# Altium PCB relay.PcbDoc
Units mil, origin at the board's own origin, x right, y up, seen from the top; angles counter-clockwise.
Board outline 1401.57 x 1050 mil, 2 copper layers (Top, Bottom), stack 61.811 mil thick; 76 components, 42 nets, 205 pads, 48 vias.
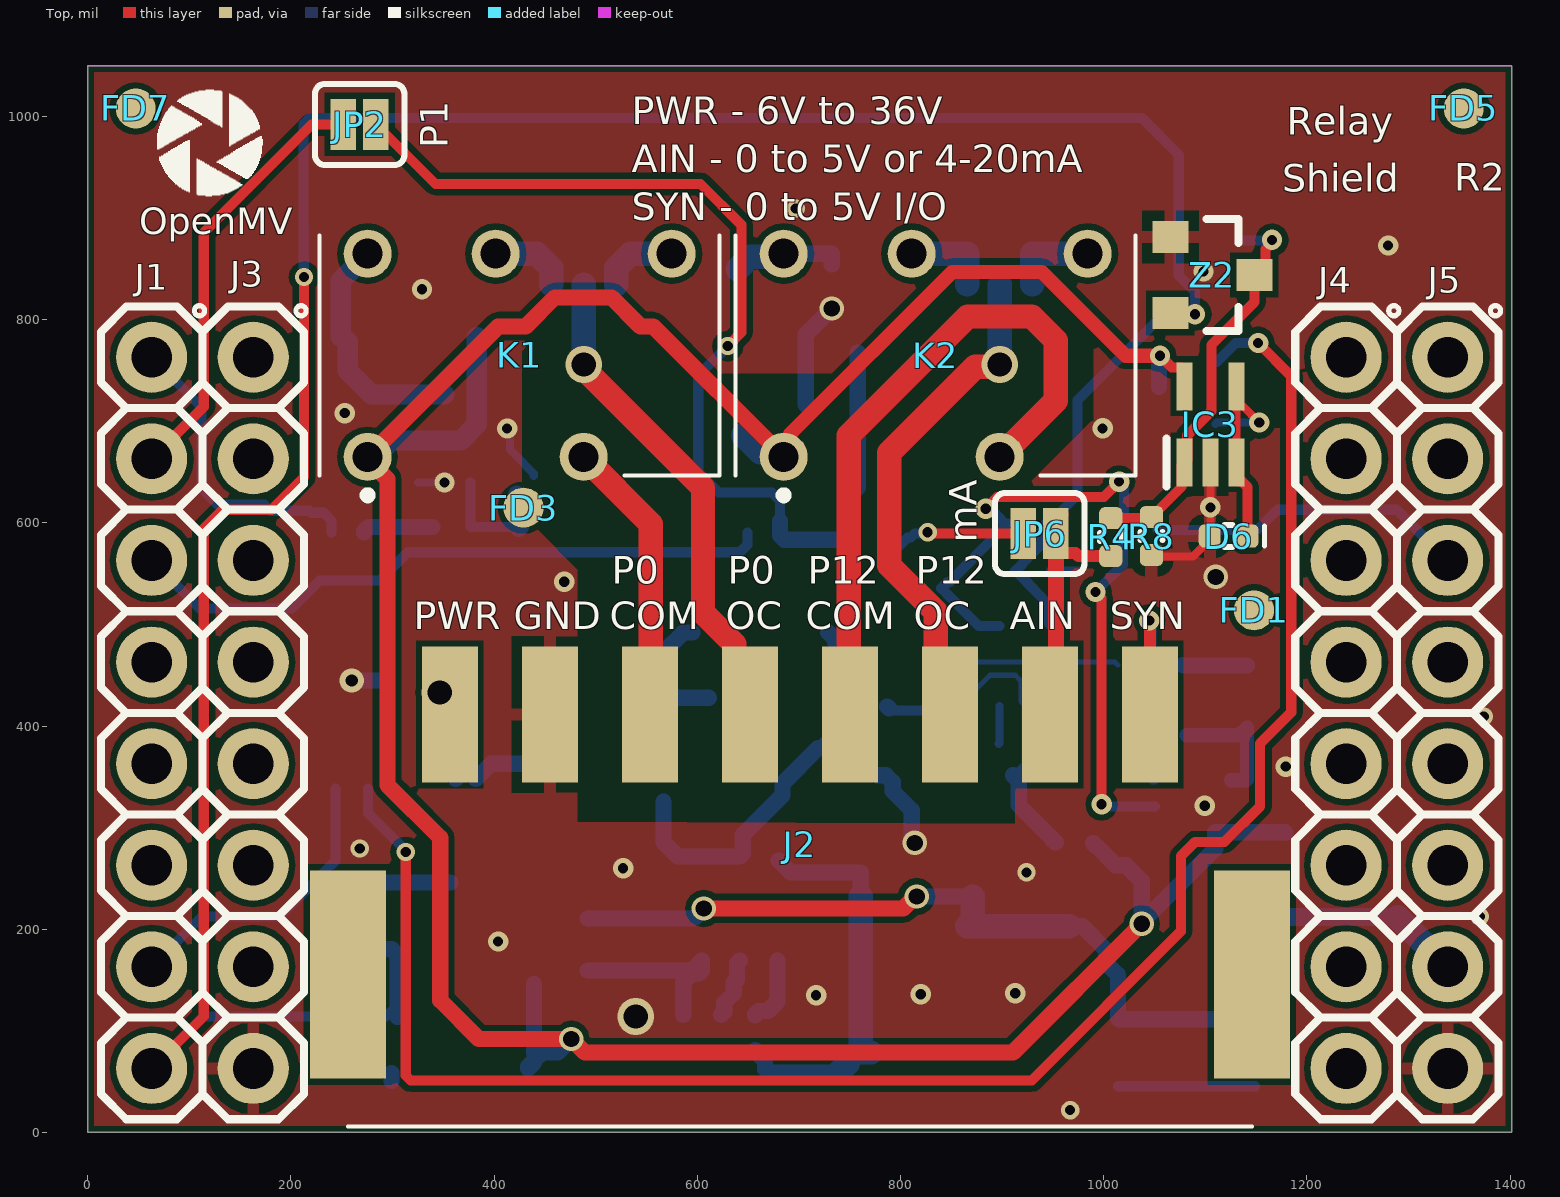
[diagram p0: Top view]
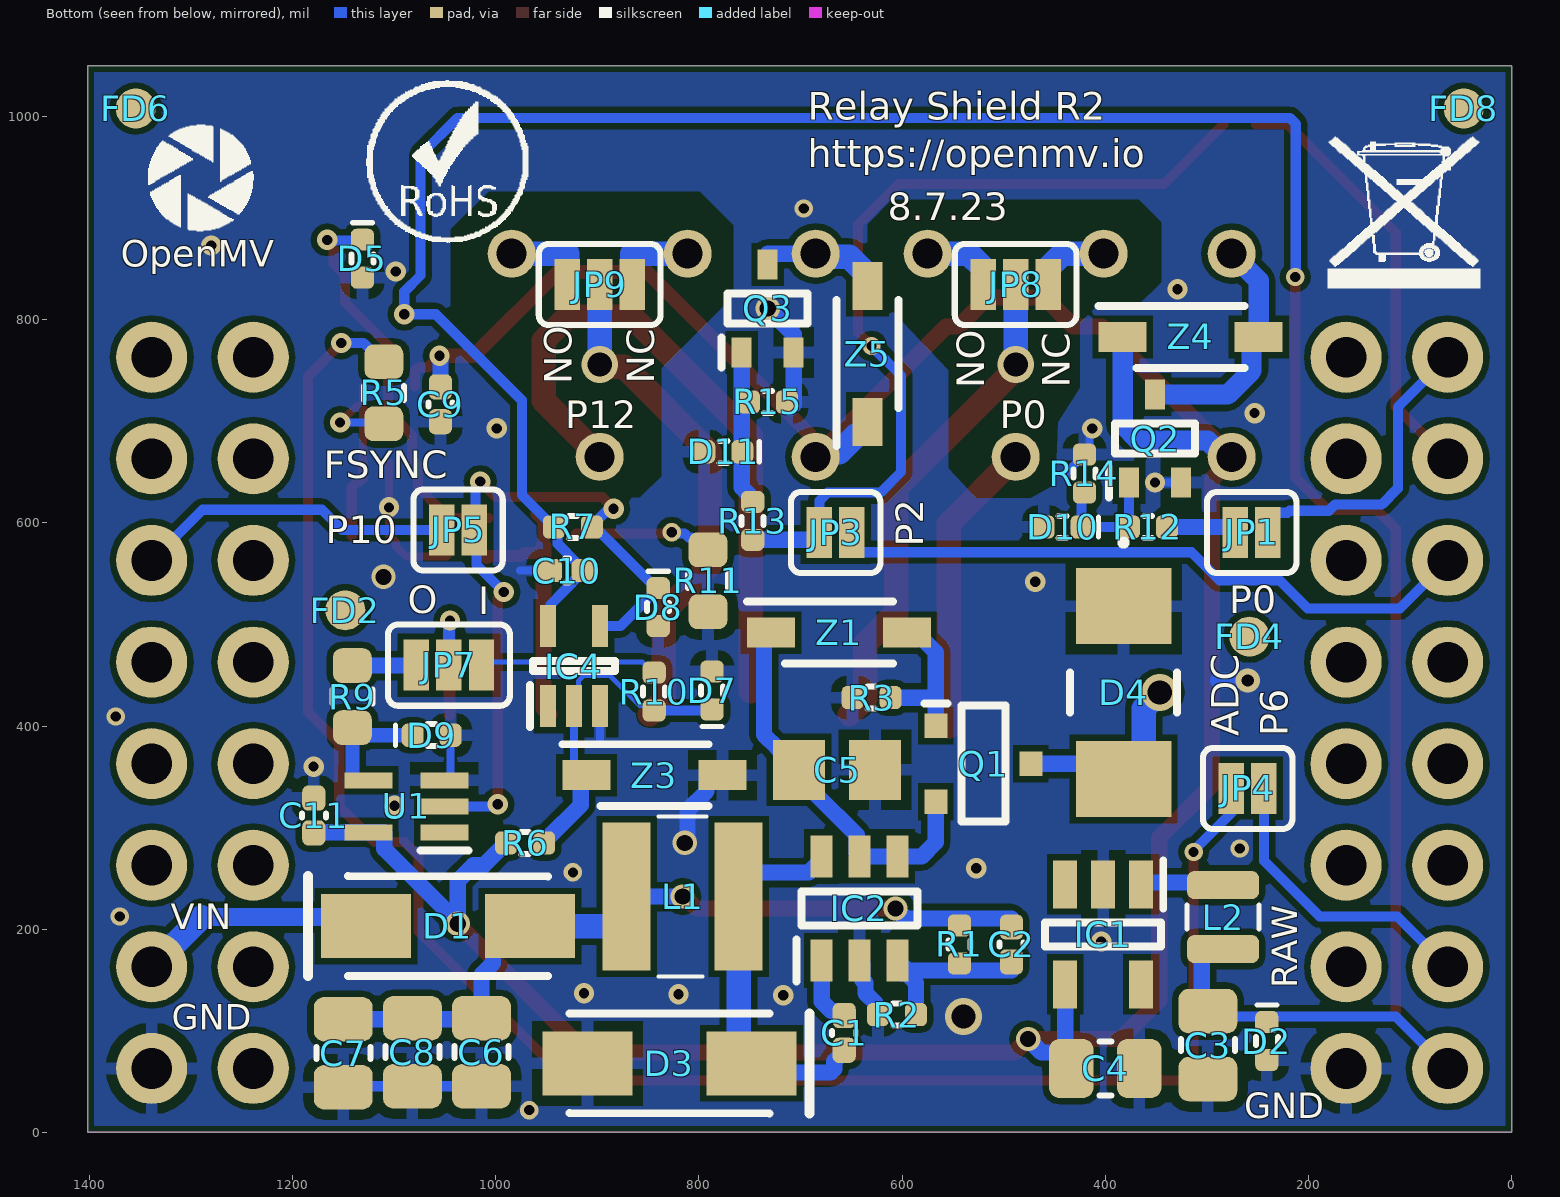
[diagram p1: Bottom view, seen from below]
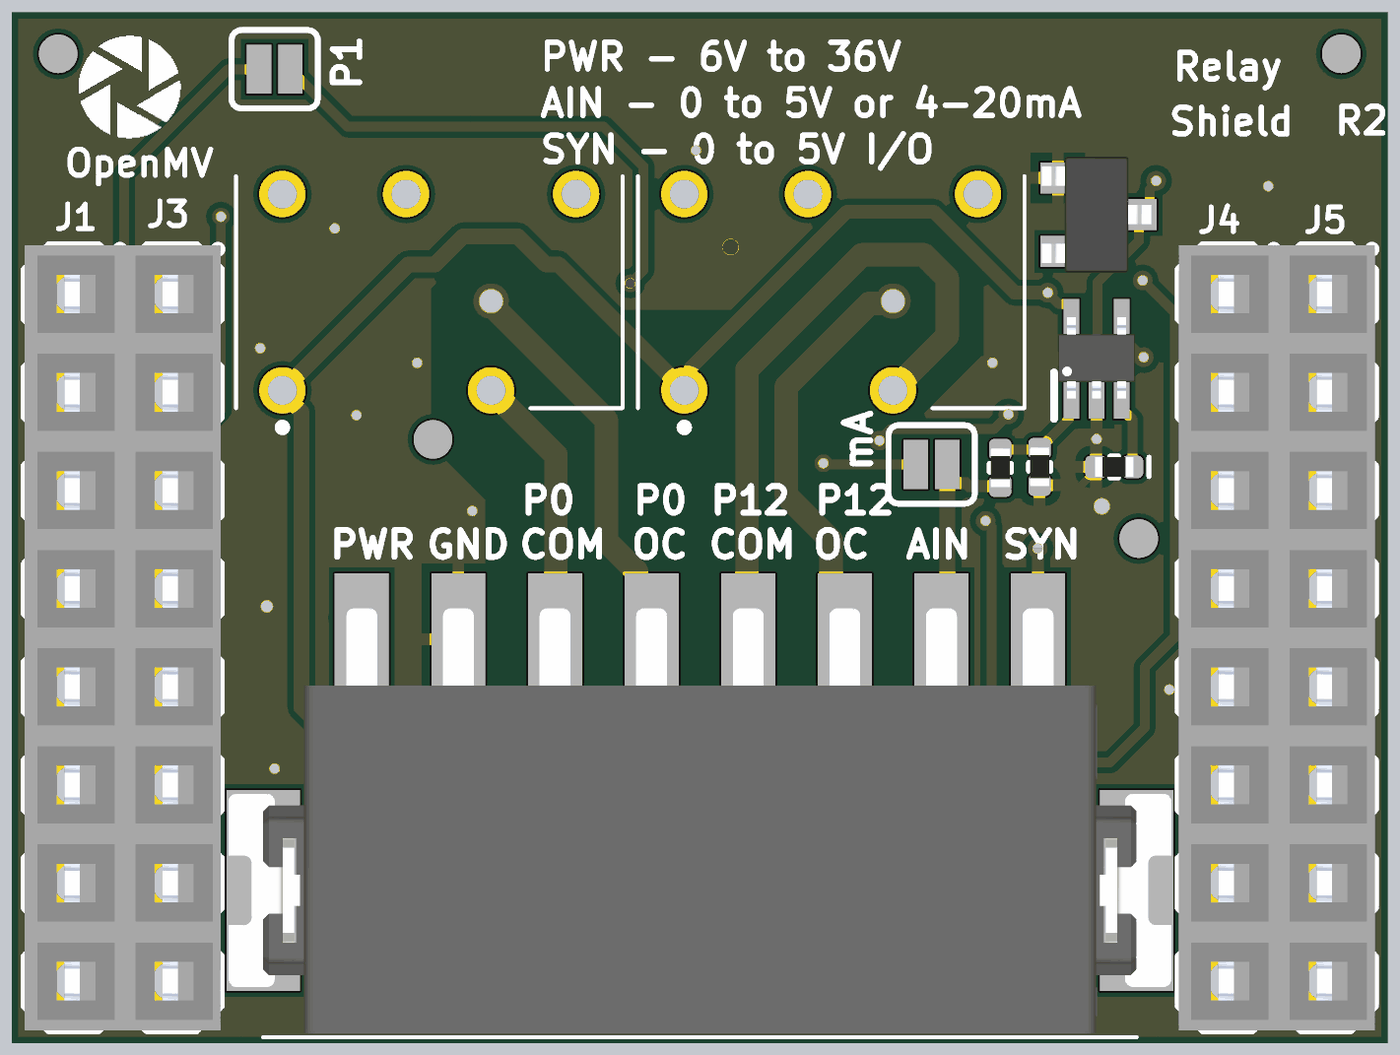
[diagram p2: 3D render of the assembled board from above, using the file's embedded part models]
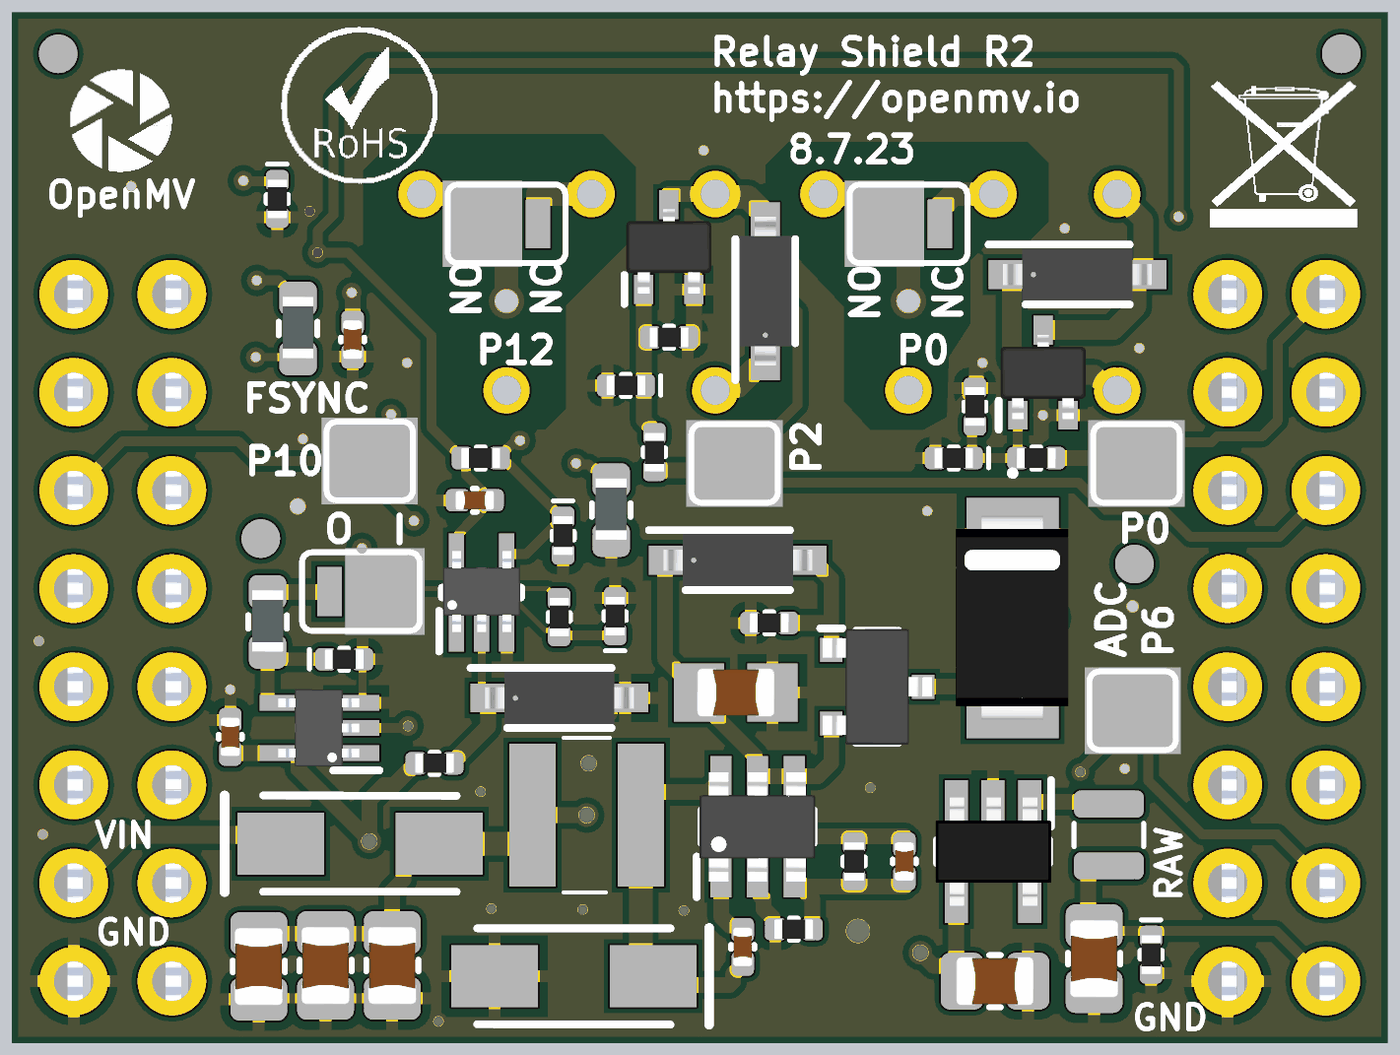
[diagram p3: 3D render of the assembled board from below, using the file's embedded part models]

## Layer stack, top to bottom
Top Solder: solder mask 0.4, Solder Resist, Dk 3.5
Top: signal copper 1.378
Dielectric 1: dielectric 59.0551, FR-4, Dk 4.8
Bottom: signal copper 1.378
Bottom Solder: solder mask 0.4, Solder Resist, Dk 3.5

## Board outline
0,1050 0,0 1401.57,0 1401.57,1050

## Design rules (kind name [scope] priority, off if disabled: settings)
BoardOutlineClearance mdCopperDimension [All] p1: gap=5 ignorepadtopadclearanceinfootprint=FALSE
Clearance AC [InNetClass('acpwr') vs not InNetClass('acpwr')] p1: gap=35 ignorepadtopadclearanceinfootprint=FALSE
Clearance Clearance_for_PolygonClass_Isolate_6 [InPolygonClass('Isolate_6') vs IsArc Or IsTrack Or IsPad Or IsVia Or IsFill Or IsRegion Or IsText] p2: gap=6 ignorepadtopadclearanceinfootprint=FALSE
Clearance [All] p3: gap=5 ignorepadtopadclearanceinfootprint=FALSE
ComponentClearance J1 [InComponent('J1')] p1: gap=0 collisioncheckmode=3 verticalgap=0 showdistances=FALSE
ComponentClearance [not InComponent('J1')] p2: gap=10 collisioncheckmode=3 verticalgap=10 showdistances=FALSE
HoleSize HoleSize_For_NetClass_hipwr [InNetClass('hipwr')] p1: absolutevalues=TRUE maxlimit=10 minlimit=10 maxpercent=80.000 minpercent=20.000
HoleSize HoleSize_For_NetClass_acpwr [InNetClass('acpwr')] p2: absolutevalues=TRUE maxlimit=10 minlimit=10 maxpercent=80.000 minpercent=20.000
HoleSize HoleSize_For_NetClass_signal [InNetClass('signal')] p3: absolutevalues=TRUE maxlimit=10 minlimit=10 maxpercent=80.000 minpercent=20.000
HoleSize HoleSize_For_NetClass_pwr [InNetClass('pwr')] p4: absolutevalues=TRUE maxlimit=10 minlimit=10 maxpercent=80.000 minpercent=20.000
HoleSize HoleSize_For_NetClass_gnd [InNetClass('gnd')] p5: absolutevalues=TRUE maxlimit=10 minlimit=10 maxpercent=80.000 minpercent=20.000
HoleSize [All] p6: absolutevalues=TRUE maxlimit=100000 minlimit=10 maxpercent=80.000 minpercent=20.000
HoleToHoleClearance mdDrill [All] p1: gap=10 allowstackedmicrovias=TRUE
MinimumSolderMaskSliver [All] p1 off: minsoldermaskwidth=10
PasteMaskExpansion Expansion_SMDPaste_OFF [InPadClass('SMDPaste_OFF')] p1: expansion=0
PasteMaskExpansion mlMinCreamFrame [All] p2: expansion=0
PolygonConnect PolygonConnect_For_PolygonThermal_ON_Width120000_Gap100000 [InPolygonClass('PolygonThermal_ON_Width120000_Gap100000') vs Not IsVia] p1: connectstyle=Relief reliefconductorwidth=12 reliefentries=4 polygonreliefangle="90 Angle" airgapwidth=10
PolygonConnect ThermalVias [IsVia] p2: connectstyle=Direct reliefconductorwidth=10 reliefentries=4 polygonreliefangle="90 Angle" airgapwidth=10
PolygonConnect [All] p3: connectstyle=Relief reliefconductorwidth=10 reliefentries=4 polygonreliefangle="90 Angle" airgapwidth=10
RoutingVias [All] p1: holewidth=10 width=18 viastyle="Through Hole" minholewidth=10 minwidth=18 maxholewidth=100 maxwidth=100
SolderMaskExpansion mlMinStopFrame [All] p1: expansion=2 istentingtop=FALSE
Width [All] p1: maxlimit=200 minlimit=5 preferedwidth=5
25 further rules are at their usual default settings.

## Classes and differential pairs
polygon class PolygonThermal_ON_Width120000_Gap100000: Polygon_1_Net_GND Polygon_2_Net_GND
polygon class Isolate_6: Polygon_1_Net_GND Polygon_2_Net_GND
pad class SMDPaste_OFF: FD1-1 FD2-1 FD3-1 FD4-1 FD5-1 FD6-1 FD7-1 FD8-1 JP1-1 JP1-2 JP2-1 JP2-2 JP3-1 JP3-2 JP4-1 JP4-2 JP5-1 JP5-2 JP6-1 JP6-2 JP7-1 JP7-2 JP7-3 JP8-1 JP8-2 JP8-3 JP9-1 JP9-2 JP9-3

## Components (designator, comment, footprint, x,y, rotation, side; value= is the part's Value field where it differs from the comment)
C1 "0.1uF" 0402-CAP 657,98 r270 bottom
C2 "100pF" 0402-CAP 492.31,185.04 r270 bottom
C3 "22uF" 0805 299,86 r90 bottom
C4 "22uF" 0805 400,63 r0 bottom
C5 "10uF" C0805 664,357 r180 bottom
C6 "22uF" 0805 1014,79 r90 bottom
C7 "22uF" 0805 1150,78 r90 bottom
C8 "22uF" 0805 1082,79 r90 bottom
C9 "0.1uF" 0402-CAP 1054.4,716.71 r90 bottom
C10 "0.1uF" 0402-CAP 930,553 r180 bottom
C11 "0.1uF" 0402-CAP 1179,312 r270 bottom
D1 "FM240A" DIOM5025X231N 1047,203 r180 bottom
D2 "CPDQT5V0HE-HF" CPDQT5V0HEHF 241,90 r270 bottom
D3 "FM240A" DIOM5025X231N 829,68 r0 bottom
D4 "SMAJ40CAE3_TR13" SMAJ40CAE3TR13 382,433 r270 bottom
D5 "CPDQT5V0HE-HF" CPDQT5V0HEHF 1131.16,859.99 r270 bottom
D6 "CPDQT5V0HE-HF" CPDQT5V0HEHF 1123,587 r180 top
D7 "CPDQT5V0HE-HF" CPDQT5V0HEHF 787,435 r90 bottom
D8 "CPDQT5V0HE-HF" CPDQT5V0HEHF 840,517 r270 bottom
D9 "CPDQT5V0HE-HF" CPDQT5V0HEHF 1063,391 r180 bottom
D10 "CPDQT5V0HE-HF" CPDQT5V0HEHF 442,596 r0 bottom
D11 "CPDQT5V0HE-HF" CPDQT5V0HEHF 776,670 r0 bottom
FD1 "FIDUCIAL1X2" FIDUCIAL-1X2 1148,514 r0 top
FD2 "FIDUCIAL1X2" FIDUCIAL-1X2 1148,514 r180 bottom
FD3 "FIDUCIAL1X2" FIDUCIAL-1X2 429,615 r0 top
FD4 "FIDUCIAL1X2" FIDUCIAL-1X2 258,488 r180 bottom
FD5 "FIDUCIAL1X2" FIDUCIAL-1X2 1354.33,1007.87 r0 top
FD6 "FIDUCIAL1X2" FIDUCIAL-1X2 1354.33,1007.87 r180 bottom
FD7 "FIDUCIAL1X2" FIDUCIAL-1X2 47.24,1007.87 r0 top
FD8 "FIDUCIAL1X2" FIDUCIAL-1X2 47.24,1007.87 r180 bottom
IC1 "TPS613222ADBVR" SOT95P280X145-5N 402,195 r270 bottom
IC2 "AP64060WU-7" SOT95P280X100-6N 641.91,220.47 r90 bottom
IC3 "LM321LVIDCKR" SOT65P210X110-5N 1105,697 r90 top
IC4 "74LVC1G07GW,125" SOT65P212X110-5N 923,459 r90 bottom
J1 "SSQ-108-03-T-S" HDR_1X8 62.99,762.99 r0 top
J2 "1771088" 1771088 700.97,411.45 r0 top
J3 "SSQ-108-03-T-S" HDR_1X8 162.99,762.99 r0 top
J4 "SSQ-108-03-T-S" HDR_1X8 1238.58,762.99 r0 top
J5 "SSQ-108-03-T-S" HDR_1X8 1338.58,762.99 r0 top
JP1 "JUMPER-SMT_2_NC_PASTE_SILK" SMT-JUMPER_2_NC_PASTE_SILK 255.91,590.55 r0 bottom
JP2 "JUMPER-SMT_2_NO_SILK" SMT-JUMPER_2_NO_SILK 267.72,992.13 r0 top
JP3 "JUMPER-SMT_2_NC_PASTE_SILK" SMT-JUMPER_2_NC_PASTE_SILK 665.35,590.55 r0 bottom
JP4 "JUMPER-SMT_2_NC_PASTE_SILK" SMT-JUMPER_2_NC_PASTE_SILK 259.84,338.58 r0 bottom
JP5 "JUMPER-SMT_2_NC_PASTE_SILK" SMT-JUMPER_2_NC_PASTE_SILK 1037,593 r180 bottom
JP6 "JUMPER-SMT_2_NO_SILK" SMT-JUMPER_2_NO_SILK 937,589.49 r0 top
JP7 "JUMPER-SMT_3_1-NC_PASTE_SILK" SMT-JUMPER_3_1-NC_PASTE_SILK 1046,460 r180 bottom
JP8 "JUMPER-SMT_3_1-NC_PASTE_SILK" SMT-JUMPER_3_1-NC_PASTE_SILK 488.19,834.65 r0 bottom
JP9 "JUMPER-SMT_3_1-NC_PASTE_SILK" SMT-JUMPER_3_1-NC_PASTE_SILK 897.64,834.65 r0 bottom
K1 "IMC03TS" IMC03TS 425.2,755.91 r0 top
K2 "IMC03TS" IMC03TS 834.65,755.91 r0 top
L1 "NRS4018T100MDGJ" NRS4018T100MDGJ 815.98,232.26 r0 bottom
L2 "MAKK2016T2R2M" INDC2016X100N 284,212 r90 bottom
Q1 "SSM3J356R,LF" SOTFL95P240X88-3N 520,363 r180 bottom
Q2 "2N7002KW_R1_00001" SOT65P210X110-3N 351,683 r90 bottom
Q3 "2N7002KW_R1_00001" SOT65P210X110-3N 732.28,811.02 r90 bottom
R1 "133K" 0402-RES 543.49,185.04 r270 bottom
R2 "22.1K" 0402-RES 605,116 r0 bottom
R3 "100K" 0402-RES 630,428 r0 bottom
R4 "51K" 0402-RES 1007,586 r270 top
R5 "470" R0603 1110,729 r90 bottom
R6 "100K" 0402-RES 971,285 r180 bottom
R7 "100K" 0402-RES 924,596 r180 bottom
R8 "100K" 0402-RES 1047,587 r270 top
R9 "470" R0603 1141,430 r90 bottom
R10 "10K" 0402-RES 844,434 r90 bottom
R11 "240" R0603 791,544 r90 bottom
R12 "10K" 0402-RES 358,596 r0 bottom
R13 "10K" 0402-RES 747,602 r90 bottom
R14 "100K" 0402-RES 420.49,648.51 r270 bottom
R15 "100K" 0402-RES 732,719 r0 bottom
U1 "74LVC1G17SE-7" SOT65P210X110-5N 1088,321 r0 bottom
Z1 "MMSZ5231B-7-F" SOD3716X145N 662,492 r180 bottom
Z2 "BAT54S_R1_00001" SOT23-3 1105,844 r270 top
Z3 "MMSZ5231B-7-F" SOD3716X145N 843.73,351.61 r180 bottom
Z4 "MMSZ5231B-7-F" SOD3716X145N 316,783 r180 bottom
Z5 "MMSZ5231B-7-F" SOD3716X145N 634,766 r90 bottom

## Footprints (in the part's own frame and the unit in brackets; to place one, negate y for a bottom-side part, rotate by r counter-clockwise, add the part's x,y. Pads: shape width x height; smd on the part's side, far side on the other; paste and mask are expansions set on the pad)
0402-CAP [mm] "Chip Capacitor, 2-Leads, Body  0402 (in) 1005 (mm), IPC Medium Density"
  rrect52% 0.63x0.58 smd mask+0.05: 1(-0.435,0) 2(0.435,0)
  silkscreen extent -0.05,-0.3 0.05,0.3, body extent -0.5,-0.25 0.5,0.25, height 0.5
0402-RES [mm] "Chip Resistor, 2-Leads, Body  0402 (in) 1005 (mm), IPC Medium Density"
  rrect51% 0.55x0.58 smd mask+0.05: 1(-0.475,0) 2(0.475,0)
  silkscreen extent -0.1,-0.28 0.1,0.28, body extent -0.5,-0.25 0.5,0.25, height 0.34
0805 [mm] "Chip Capacitor, Body 0805 imperial, 2.0x1.2mm, IPC Medium Density"
  rrect45% 1.11x1.47 smd: 1(-0.85,0) 2(0.85,0)
  silkscreen extent -0.15,-0.67 0.15,0.67, body extent -1,-0.62 1,0.63, height 1.25
1771088 [mm] "1771088"
  rect 1.4x3.4 smd: 1(-8.75,0) 2(-6.25,0) 3(-3.75,0) 4(-1.25,0) 5(1.25,0) 6(3.75,0) 7(6.25,0) 8(8.75,0)
  rect 1.9x5.2 smd: 9(-11.3,-6.5) 10(11.3,-6.5)
  silkscreen extent -11.3,-10.3 11.3,-10.3, body extent -12.2,-10.2 12.2,0.8, height 5.1
C0805 [mil] "C0805"
  rect 51.18x59.06 smd: 1(-37.4,0) 2(37.4,0)
  body extent -39,-25 39,25, height 49
CPDQT5V0HEHF [mm] "CPDQT5V0HEHF"
  rrect51% 0.55x0.58 smd mask+0.05: 1(-0.475,0) 2(0.475,0)
  silkscreen extent -0.9,-0.27 0.1,0.28, body extent -0.5,-0.25 0.5,0.25, height 0.34
DIOM5025X231N [mil] "DIOM5025X231N"
  rect 88.58x62.99 smd: 1(-80.71,0) 2(80.71,0)
  silkscreen extent -138,-49 98,49, body extent -89,-49 89,49, height 79
FIDUCIAL-1X2 [mm] "FIDUCIAL-1X2"
  rrect100% 1x1 smd paste+0: 1(0,0)
HDR_1X8 [mil]
  round 70 hole 40: 1(0,0) 2(0,-100) 3(0,-200) 4(0,-300) 5(0,-400) 6(0,-500) 7(0,-600) 8(0,-700)
  silkscreen extent -50,-750 52,51, body extent -50,-750 50,50, height 335
IMC03TS [mil] "IMC03TS"
  round 47.24 / inner round 0 / far side round 47.24 hole 29.53: 1(-149.61,-90.94) 3(62.99,-90.94) 5(149.61,109.06) 7(-23.62,109.06) 8(-149.61,109.06)
  silkscreen extent -197,-133 197,127, body extent -197,-106 197,130, height 222
INDC2016X100N [mm] "INDC2016X100N"
  rrect50% 0.7x1.8 smd: 1(-0.8,0) 2(0.8,0)
  silkscreen extent -0.3,-0.9 0.3,0.9, body extent -1,-0.8 1,0.8, height 1
NRS4018T100MDGJ [mm] "NRS4018T100MDGJ"
  rect 1.2x3.7 smd: 1(-1.4,0) 2(1.4,0)
  silkscreen extent -0.6,-2 0.6,2, body extent -2,-2 2,2, height 1.8
R0603 [mm] "R0603"
  rrect51% 0.87x0.97 smd mask+0.05: 1(-0.8,0) 2(0.75,0)
  silkscreen extent -0.2,-0.5 0.15,0.5, body extent -0.8,-0.4 0.8,0.4, height 0.45
SMAJ40CAE3TR13 [mm] "SMAJ40CAE3TR13"
  rect 1.9x2.39 smd: 1(-2.16,0) 2(2.16,0)
  silkscreen extent -3.8,-1.34 0.5,1.34, body extent -2.65,-1.47 2.63,1.45, height 2.41
SMT-JUMPER_2_NC_PASTE_SILK [mil] "SMT-JUMPER_2_NC_PASTE_SILK"
  rect 25x50 smd paste+0: 1(-16,0) 2(16,0)
  silkscreen extent -44,-40 44,40
SMT-JUMPER_2_NO_SILK [mil] "SMT-JUMPER_2_NO_SILK"
  rect 25x50 smd paste+0: 1(-16,0) 2(16,0)
  silkscreen extent -44,-40 44,40
SMT-JUMPER_3_1-NC_PASTE_SILK [mil] "SMT-JUMPER_3_1-NC_PASTE_SILK"
  rect 25x50 smd paste+0: 1(-32,0) 2(0,0) 3(32,0)
  silkscreen extent -60,-40 60,40
SOD3716X145N [mil] "SOD3716X145N"
  rect 47.24x29.53 smd: 1(-66.93,0) 2(66.93,0)
  silkscreen extent -91,-31 53,31, body extent -76,-27 76,27, height 32
SOT23-3 [mil] "SOT23-3"
  rect 31.5x35.43 smd: 1(-37.4,-39.37) 2(37.4,-39.37) 3(0,43.31)
  silkscreen extent -55,-4 55,28, body extent -59,-56 59,56, height 47
SOT65P210X110-3N [mm] "SOT65P210X110-3N"
  rect 0.75x0.5 smd: 1(-1.1,0.65) 2(-1.1,-0.65) 3(1.1,0)
  silkscreen extent -1.47,-1 0.37,1.15, body extent -1.2,-1.1 1.2,1.1, height 1.1
SOT65P210X110-5N [mm] "SOT65P210X110-5N"
  rect 1.2x0.4 smd: 1(-0.95,0.65) 2(-0.95,0) 3(-0.95,-0.65) 4(0.95,-0.65) 5(0.95,0.65)
  silkscreen extent -1.55,1.1 -0.35,1.1, body extent -1.02,-1 1.07,1, height 0.96
SOT65P212X110-5N [mm] "SOT65P212X110-5N"
  rect 1.05x0.4 smd: 1(-1,0.65) 2(-1,0) 3(-1,-0.65) 4(1,-0.65) 5(1,0.65)
  silkscreen extent -1.53,-1.02 0.12,1.1, body extent -1.02,-1 1.07,1, height 0.96
SOT95P280X100-6N [mil] "SOT95P280X100-6N"
  rect 41.34x21.65 smd: 1(-51.18,37.4) 2(-51.18,0) 3(-51.18,-37.4) 4(51.18,-37.4) 5(51.18,0) 6(51.18,37.4)
  silkscreen extent -72,-57 17,62, body extent -56,-59 56,59, height 44
SOT95P280X145-5N [mil] "SOT95P280X145-5N"
  rect 47.24x23.62 smd: 1(-49.21,37.4) 2(-49.21,0) 3(-49.21,-37.4) 4(49.21,-37.4) 5(49.21,37.4)
  silkscreen extent -73,-57 12,59, body extent -55,-59 55,59, height 46
SOTFL95P240X88-3N [mm] "SOTFL95P240X88-3N"
  rect 0.575x0.62 smd: 1(-1.188,0.95) 2(-1.188,-0.95) 3(1.188,0)
  silkscreen extent -1.47,-1.45 0.55,1.51, body extent -1.42,-1.5 1.42,1.5, height 1.11

## Part data
C1 C9 C10 C11: library part CAP0402-CAP, "CapacitorStandard 0603 ceramic capacitor, and 0.1\" leaded capacitor.", MPN=GRM155R71H104KE14D, DeviceName=0402-CAP, DeviceSetName=CAP, GateName_1=G$1, LibraryName=sfe, SymbolName_1=CAP
C2: library part CAP0402-CAP, "CapacitorStandard 0603 ceramic capacitor, and 0.1\" leaded capacitor.", MPN=CC0402JRNPO9BN101, DeviceName=0402-CAP, DeviceSetName=CAP, GateName_1=G$1, LibraryName=sfe, SymbolName_1=CAP
C3 C4 C6 C7 C8: library part 22UF-0805-6.3V-20%, "22ÂµF ceramic capacitors    A capacitor is a passive two-terminal electrical component used to store electrical energy temporarily in an electric field.", MPN=CL21A226MQQNNNE, DeviceName=-0805-6.3V-20%, DeviceSetName=22UF, GateName_1=G$1, LibraryName=SparkFun-Capacitors, PROD_ID=CAP-08402, SymbolName_1=CAP
C5: library part C-EUC0805, "CAPACITOR, European symbol", MPN=GRM21BR61H106KE43K, DeviceName=C0805, DeviceSetName=C-EU, GateName_1=G$1, LibraryName=rcl, POPULARITY=88, SPICEPREFIX=C, SymbolName_1=C-EU
D1 D3: "Diodes - General Purpose, Power, Switching GP Si Rectifier SMB,2A,40V   Source:  Datasheet", MANUFACTURER_NAME=Rectron, DeviceSetName=FM240A, GateName_1=G$1, HEIGHT=2.31mm, LibraryName=FM240A, MANUFACTURER_PART_NUMBER=FM240A, MOUSER_PART_NUMBER=583-FM240A, MOUSER_PRICE-STOCK=https://www.mouser.co.uk/ProductDetail/Rectron/FM240A?qs=7pEAo90IqNG7sknZwmLYhQ%3D%3D, MPN=FM240A, SymbolName_1=FM240A
D2 D5 D6 D7 D8 D9 D10 D11: "ESD Suppressors / TVS Diodes DIODE ESD 5VWM 65W 0402/SOD-923F   Source:  Datasheet", MANUFACTURER_NAME="Comchip Technology", DeviceSetName=CPDQT5V0HE-HF, GateName_1=G$1, HEIGHT=0.42mm, LibraryName=CPDQT5V0HE-HF, MANUFACTURER_PART_NUMBER=CPDQT5V0HE-HF, MOUSER_PART_NUMBER=MOUSER_PART_NUMBER, MOUSER_PRICE-STOCK=MOUSER_PRICE-STOCK, MPN=CPDQT5V0HE-HF, SymbolName_1=CPDQT5V0HE-HF
D4: "ESD Suppressors / TVS Diodes TVS   Source:  Datasheet", MANUFACTURER_NAME=Microchip, MANUFACTURER_PART_NUMBER=SMAJ40CAe3/TR13, DeviceSetName=SMAJ40CAE3_TR13, GateName_1=G$1, HEIGHT=3.05mm, LibraryName=SMAJ40CAe3_TR13, MOUSER_PART_NUMBER=494-SMAJ40CAE3/TR13, MOUSER_PRICE-STOCK=https://www.mouser.co.uk/ProductDetail/Microchip-Technology/SMAJ40CAe3-TR13?qs=pU29NIZ4ZwCw3PnlxOleOw%3D%3D, MPN=SMAJ40CAe3/TR13, SymbolName_1=SMAJ40CAE3_TR13
FD1 FD2 FD3 FD4 FD5 FD6 FD7 FD8: "Fiducial Alignment Points    Point-of-reference for pick-and-place machines and other optical instruments.", DeviceName=1X2, DeviceSetName=FIDUCIAL, GateName_1=G$1, LibraryName=SparkFun-Aesthetics, SymbolName_1=FIDUCIAL
IC1: "6-uA Quiescent Current, 1.8-A Switch Current Boost Converter   Source:  Datasheet", MANUFACTURER_NAME="Texas Instruments", DeviceSetName=TPS613222ADBVR, GateName_1=G$1, HEIGHT=1.45mm, LibraryName=TPS613222ADBVR, MANUFACTURER_PART_NUMBER=TPS613222ADBVR, MOUSER_PART_NUMBER=595-TPS613222ADBVR, MOUSER_PRICE-STOCK=https://www.mouser.co.uk/ProductDetail/Texas-Instruments/TPS613222ADBVR?qs=W0yvOO0ixfE4d69WXsn8NQ%3D%3D, MPN=TPS613222ADBVR, SymbolName_1=TPS613222ADBVR
IC2: "Switching Voltage Regulators DCDC Conv HV Buck TSOT26(STD) T&R 3K   Source:  Datasheet", MANUFACTURER_NAME="Diodes Inc.", DeviceSetName=AP64060WU-7, GateName_1=G$1, HEIGHT=1mm, LibraryName=AP64060WU-7, MANUFACTURER_PART_NUMBER=AP64060WU-7, MOUSER_PART_NUMBER=621-AP64060WU-7, MOUSER_PRICE-STOCK=https://www.mouser.co.uk/ProductDetail/Diodes-Incorporated/AP64060WU-7?qs=Li%252BoUPsLEntiZYjFw%252BCbiQ%3D%3D, MPN=AP64060WU-7, SymbolName_1=AP64060WU-7
IC3: "1-Channel industry standard low voltage operational amplifier   Source:  Datasheet", MANUFACTURER_NAME="Texas Instruments", DeviceSetName=LM321LVIDCKR, GateName_1=G$1, HEIGHT=1.1mm, LibraryName=LM321LVIDCKR, MANUFACTURER_PART_NUMBER=LM321LVIDCKR, MOUSER_PART_NUMBER=595-LM321LVIDCKR, MOUSER_PRICE-STOCK=https://www.mouser.co.uk/ProductDetail/Texas-Instruments/LM321LVIDCKR?qs=qSfuJ%252Bfl%2Fd6RcyTOjkRx5Q%3D%3D, MPN=LM321LVIDCKR, SymbolName_1=LM321LVIDCKR
IC4: "74LVC1G07 - Buffer with open-drain output@en-us   Source:  Datasheet", MANUFACTURER_NAME=Nexperia, DeviceSetName=74LVC1G07GW,125, GateName_1=G$1, HEIGHT=1.1mm, LibraryName=74LVC1G07GW_125, MANUFACTURER_PART_NUMBER=74LVC1G07GW,125, MOUSER_PART_NUMBER=771-74LVC1G07GW-G, MOUSER_PRICE-STOCK=https://www.mouser.co.uk/ProductDetail/Nexperia/74LVC1G07GW125?qs=me8TqzrmIYW763Mg%2FG86Uw%3D%3D, MPN=74LVC1G07GW,125, SymbolName_1=74LVC1G07GW,125
J1 J3 J4 J5: library part HDR_1X8, MANUFACTURER P/N=SSQ-108-03-T-S
J2: "PCB terminal block, nominal current: 6 A, rated voltage (III/2): 160 V, nominal cross section: 0.5 mm?, Number of potentials: 8, Number of rows: 1, Number of positions per row: 8, product range: PTSM 0,5/..-H-SMD, pitch: 2.5 mm, connection method: Push-in spring connection, mounting: SMD soldering, conductor/PCB connection direction: 0 ?, color: black, Pin layout: Linear pad geometry, type of packaging: packed in cardboard   Source:  Datasheet", MANUFACTURER_NAME="Phoenix Contact", DeviceSetName=1771088, GateName_1=G$1, HEIGHT=5.22mm, LibraryName=1771088, MANUFACTURER_PART_NUMBER=1771088, MOUSER_PART_NUMBER=651-1771088, MOUSER_PRICE-STOCK=https://www.mouser.co.uk/ProductDetail/Phoenix-Contact/1771088?qs=Q77YN%2FRrsKIDMojcNKtpFQ%3D%3D, MPN=1771088, SymbolName_1=1771088
JP1 JP3 JP4 JP5: "Normally closed solder jumper    This jumper has an aperture in the stencil to allow solder paste to bridge the split in the wire so it's normally closed (NC). Wick off the solder to open the connection. Reapply solder to reclose the connection.", DeviceName=_SILK, DeviceSetName=JUMPER-SMT_2_NC_PASTE, GateName_1=G$1, LibraryName=SparkFun-Jumpers, SymbolName_1=SMT-JUMPER_2_NC_PASTE
JP2 JP6: "Normally open jumper    This jumper has two pads in close proximity to each other. Apply solder to close the connection.   Round pads are easier to solder for beginners, but are a lot larger.   SparkFun Product that uses the round pads:  SparkFun EL Sequencer", DeviceName=_SILK, DeviceSetName=JUMPER-SMT_2_NO, GateName_1=G$1, LibraryName=SparkFun-Jumpers, SymbolName_1=SMT-JUMPER_2_NO
JP7 JP8 JP9: "Normally closed solder jumper (1 of 2 connections)    This jumper has an aperture in the stencil to allow solder paste to bridge one of the two connections. One connection is normally closed (NC), while the other is normally open (NO). Wick off the solder to open the connection. Reapply solder to reclose the connection. Apply solder to the other side instead to change the current path.", DeviceName=_SILK, DeviceSetName=JUMPER-SMT_3_1-NC_PASTE, GateName_1=G$1, LibraryName=SparkFun-Jumpers, SymbolName_1=SMT-JUMPER_3_1-NC_PASTE
K1 K2: "TE CONNECTIVITY - IMC03TS - RELAY, SIGNAL, SPDT, 30VDC, 2A   Source:  Datasheet", MANUFACTURER_NAME="TE Connectivity", MPN=IMC03CTS, DeviceSetName=IMC03TS, GateName_1=G$1, HEIGHT=5mm, LibraryName=IMC03TS, MANUFACTURER_PART_NUMBER=IMC03TS, MOUSER_PART_NUMBER=655-IMC03TS, MOUSER_PRICE-STOCK=https://www.mouser.co.uk/ProductDetail/TE-Connectivity/IMC03TS?qs=cjQ5B1jJSzR1ZiTl5Tzf3w%3D%3D, SymbolName_1=IMC03TS
L1: "Fixed Inductors 4018 10uH 180mOhms +/-20%Tol 1200mA   Source:  Datasheet", MANUFACTURER_NAME="TAIYO YUDEN", DeviceSetName=NRS4018T100MDGJ, GateName_1=G$1, HEIGHT=1mm, LibraryName=NRS4018T100MDGJ, MANUFACTURER_PART_NUMBER=NRS4018T100MDGJ, MOUSER_PART_NUMBER=963-NRS4018T100MDGJ, MOUSER_PRICE-STOCK=https://www.mouser.co.uk/ProductDetail/TAIYO-YUDEN/NRS4018T100MDGJ?qs=PzICbMaShUeiyHfvjt6KEw%3D%3D, MPN=NRS4018T100MDGJ, SymbolName_1=NRS4018T100MDGJ
L2: "INDUCTOR, METAL CORE Check availability", PACKAGE="2016 Taiyo Yuden", AVAILABILITY="In Stock", DeviceSetName=MAKK2016T2R2M, GateName_1=G$1, LibraryName=MAKK2016T2R2M, MF="Taiyo Yuden", MP=MAKK2016T2R2M, MPN=MAKK2016T2R2M, PRICE=None, PURCHASE-URL=https://pricing.snapeda.com/search/part/MAKK2016T2R2M/?ref=eda, SymbolName_1=MAKK2016T2R2M
Q1: "MOSFET Small-signal MOSFET ID: -2A, VDSS: -60V   Source:  Datasheet", MANUFACTURER_NAME=Toshiba, DeviceSetName=SSM3J356R,LF, GateName_1=G$1, HEIGHT=0.88mm, LibraryName=SSM3J356R_LF, MANUFACTURER_PART_NUMBER=SSM3J356R,LF, MOUSER_PART_NUMBER=757-SSM3J356RLF, MOUSER_PRICE-STOCK=https://www.mouser.co.uk/ProductDetail/Toshiba/SSM3J356RLF?qs=lhkzy8lC%252BSsL%2F1yLGjMnQA%3D%3D, MPN=SSM3J356R,LF, SymbolName_1=SSM3J356R,LF
Q2 Q3: "MOSFET 60V N-Channel Enhancement Mode MOSFET - ESD Protected   Source:  Datasheet", MANUFACTURER_NAME=PANJIT, DeviceSetName=2N7002KW_R1_00001, GateName_1=G$1, HEIGHT=1.1mm, LibraryName=2N7002KW_R1_00001, MANUFACTURER_PART_NUMBER=2N7002KW_R1_00001, MOUSER_PART_NUMBER=241-2N7002KWR100001, MOUSER_PRICE-STOCK=https://www.mouser.co.uk/ProductDetail/Panjit/2N7002KW_R1_00001?qs=sPbYRqrBIVliWKATqv7jNA%3D%3D, MPN=2N7002KW_R1_00001, SymbolName_1=2N7002KW_R1_00001
R1: library part RESISTOR0402-RES, "ResistorBasic schematic elements and footprints for 0603, 1206, and PTH resistors.", MPN=RC0402FR-07133KL, DeviceName=0402-RES, DeviceSetName=RESISTOR, GateName_1=G$1, LibraryName=sfe, SymbolName_1=RESISTOR
R2: library part RESISTOR0402-RES, "ResistorBasic schematic elements and footprints for 0603, 1206, and PTH resistors.", MPN=CR0402-FX-2212GLF, DeviceName=0402-RES, DeviceSetName=RESISTOR, GateName_1=G$1, LibraryName=sfe, SymbolName_1=RESISTOR
R3 R6 R7 R8 R14 R15: library part RESISTOR0402-RES, "ResistorBasic schematic elements and footprints for 0603, 1206, and PTH resistors.", MPN=AC0402FR-07100KL, DeviceName=0402-RES, DeviceSetName=RESISTOR, GateName_1=G$1, LibraryName=sfe, SymbolName_1=RESISTOR
R4: library part RESISTOR0402-RES, "ResistorBasic schematic elements and footprints for 0603, 1206, and PTH resistors.", MPN=RC0402JR-0751KL, DeviceName=0402-RES, DeviceSetName=RESISTOR, GateName_1=G$1, LibraryName=sfe, SymbolName_1=RESISTOR
R5 R9: library part R-US_R0603, "RESISTOR, American symbol", MPN=CR0603-FX-4700ELF, DeviceName=R0603, DeviceSetName=R-US_, GateName_1=G$1, LibraryName=rcl, POPULARITY=77, SPICEPREFIX=R, SymbolName_1=R-US
R10 R12 R13: library part RESISTOR0402-RES, "ResistorBasic schematic elements and footprints for 0603, 1206, and PTH resistors.", MPN=AC0402FR-1310KL, DeviceName=0402-RES, DeviceSetName=RESISTOR, GateName_1=G$1, LibraryName=sfe, SymbolName_1=RESISTOR
R11: library part R-US_R0603, "RESISTOR, American symbol", MPN=RK73B1JTTD241J, DeviceName=R0603, DeviceSetName=R-US_, GateName_1=G$1, LibraryName=rcl, POPULARITY=77, SPICEPREFIX=R, SymbolName_1=R-US
U1: "DiodesZetex 74LVC1G17SE-7, Buffer, Push-Pull, Non-Inverting, 1.65  5.5 V, 5-Pin SOT-353   Source:  Datasheet", MANUFACTURER_NAME="Diodes Inc.", DeviceSetName=74LVC1G17SE-7, GateName_1=G$1, HEIGHT=1.1mm, LibraryName=74LVC1G17SE-7, MANUFACTURER_PART_NUMBER=74LVC1G17SE-7, MOUSER_PART_NUMBER=621-74LVC1G17SE-7, MOUSER_PRICE-STOCK=https://www.mouser.co.uk/ProductDetail/Diodes-Incorporated/74LVC1G17SE-7?qs=FRHfhEBFk1dzIcstjqNcyA%3D%3D, MPN=74LVC1G17SE-7, SymbolName_1=74LVC1G17SE-7
Z1 Z3 Z4 Z5: "Zener Diode 5.1V 5% 500mW SOD123 Diodes Inc MMSZ5231B-7-F Zener Diode, 5.1V 5% 0.5 W SMT 2-Pin SOD-123   Source:  Datasheet", MANUFACTURER_NAME="Diodes Inc.", DeviceSetName=MMSZ5231B-7-F, GateName_1=G$1, HEIGHT=1.45mm, LibraryName=MMSZ5231B-7-F, MANUFACTURER_PART_NUMBER=MMSZ5231B-7-F, MOUSER_PART_NUMBER=621-MMSZ5231B-F, MOUSER_PRICE-STOCK=https://www.mouser.co.uk/ProductDetail/Diodes-Incorporated/MMSZ5231B-7-F?qs=2ygBApjwyeMh7Sf0YL1qSw%3D%3D, MPN=MMSZ5231B-7-F, SymbolName_1=MMSZ5231B-7-F

## Via types
v1: diameter 20, hole 10, Top to Bottom, tented both sides, 26 vias
v2: diameter 18, hole 10, Top to Bottom, tented both sides, 10 vias
v3: diameter 24, hole 16, Top to Bottom, tented both sides, 7 vias
v4: diameter 36, hole 24, Top to Bottom, tented both sides, 4 vias
v5: diameter 24, hole 12, Top to Bottom, tented both sides, 1 vias

## Nets (pads, with @x,y where several pads share a name; then routed paths per layer and width w, separated by ;. In a path a pad name is that pad's centre, name@x,y a point inside that pad or via, vN(x,y) a via of type N, cw(c..) or ccw(c..) an arc to the next point about the centre after c; other vN are vias at no path point)
AIN: J2.7 JP6.2 R4.2 | length 262.7
  Top w12: JP6.2@959.5,608.49 953,601.99 JP6.2 953,576.99 959.5,570.49 972,570.49 975.19,567.3 R4.2 R4.2@1008.79,565.51
  Top w16: J2.7 953,417.42 JP6.2@953,576.99
AIN_INT: D5.1 IC3.1 R4.1 R8.1 Z2.3 | length 395
  Top w10: R4.1 1046,604.7 R8.1 1047.31,605.7 1053.42,611.81 1053.42,612.12 1076.54,635.24 1076.54,656.73 IC3.1 1082.29,662.48 1082.29,686.28 1106,710 1106,775 1148.31,817.31 Z2.3 1148.57,844 1159.32,854.75 1159.32,869.42 1165.72,875.82 v1(1165.72,878.53)
  Bottom w10: D5.1@1133.7,878 1165.19,878 v1(1165.72,878.53)
AIN_OUT: D6.1 IC3.3 IC3.4 R5.1 | length 227.7
  Top w8: IC3.3 1130.59,714.78 IC3.4@1130.59,718.65 ; IC3.4 IC3.4@1130.59,718.65 ; v1(1153.07,698.78) 1137.07,714.78 1134.46,714.78 IC3.4@1130.59,718.65
  Top w10: IC3.3 1130.59,643.86 1133.46,640.98 1135.84,640.98 1141.7,635.12 D6.1
  Bottom w8: R5.1 1111.28,698.78 v1(1153.07,698.78)
AIN_S: JP6.1 R11.2 | length 141
  Top w10: v2(826.74,590.74) 827.99,589.49 JP6.1
  Bottom w10: R11.2@791.97,567.43 791.97,570.51 807.12,585.65 810.19,585.65 814.04,589.5 825.5,589.5 v2(826.74,590.74)
EXT_VIN: D4.2 J2.1 Q1.3 | length 189
  Bottom w16: D4.2@362.2,348.03 D4.2@362.2,370.08 ; D4.2 397.04,363 Q1.3
  Bottom w24: v4(346.46,433.07) 362.2,417.32 D4.2@362.2,370.08
EXT_VIN_BST: C1.1 IC2.1 | length 68.3
  Bottom w16: C1.1 657,116.11 660.42,119.53 669.62,119.53 678.99,128.9 IC2.1@678.99,168.97
EXT_VIN_FB: C2.2 IC2.3 R1.2 R2.1 | length 177.3
  Bottom w16: C2.2@492.31,159.45 IC2.3@594.67,159.45 ; R2.1 586.3,147.25 595.67,156.62 601.68,156.62 604.51,159.44 IC2.3 IC2.3@597,161.78
EXT_VIN_G: Q1.1 R3.1 Z1.2 | length 154.7
  Bottom w16: Q1.1 566.77,432.05 ; Z1.2 586.22,492 566.77,472.56 566.77,432.05 ; R3.1 570.82,428 566.77,432.05
EXT_VIN_INT: C5.1 IC2.4 IC2.5 Q1.2 Z1.1 | length 385.7
  Bottom w16: Q1.2 566.77,285.59 580.71,271.65 IC2.4 IC2.5 644.74,274.48 644.74,292.8 683.81,331.88 683.81,343.35 718.99,378.53 722.93,378.53 736,391.6 736,485.24 729.24,492 Z1.1
EXT_VIN_OUT: C2.1 C6.2 C7.2 C8.2 D1.2 L1.2 R1.1 | length 769.9
  Top w16: v3(606.48,220.47) 802.61,220.47 814.4,232.26 v3(815.98,232.26)
  Bottom w16: C2.1@492.31,210.63 596.64,210.63 v3(606.48,220.47) ; v3(815.98,232.26) L1.2 ; D1.2 979.09,203 1002.58,179.5 1002.58,166.71 1014,155.29 C6.2 1015,111.46 C7.2
  Bottom w24: L1.2@865.9,203 D1.2 ; L1.2@871.1,204.7 L1.2
EXT_VIN_SW: C1.2 D3.1 IC2.6 L1.1 | length 381.6
  Bottom w16: C1.2 657,79.89 666.75,70.14 666.75,62.56 670.17,59.14 D3.1@739.44,59.14 ; IC2.6@680.16,267.69 691.97,255.88 760.86,255.88 L1.1
  Bottom w24: D3.1@739.44,59.14 D3.1 ; L1.1 760.86,78.72 D3.1@770.7,78.72
GND: C3.1 C4.1 C5.2 C6.1 C7.1 C8.1 C9.1 C10.1 C11.1 D2.2 D3.2 D4.1 D5.2 D6.2 D7.2 D8.2 D9.2 D10.2 D11.2 IC1.2 IC2.2 IC3.2 IC4.3 J2.2 J3.8 J5.8 Q2.2 Q3.2 R2.2 R3.2 R8.2 R11.1 R14.1 R15.1 U1.3 Z2.1 Z3.2 | length 770.8
  Top w8: R8.2 1048.3,567 1088,567 1098.41,577.41 1098.41,581.11 D6.2 1105,587.7 IC3.2
  Bottom w8: Q2.2 v1(351.13,639.67) ; v1(412.84,692.96) 412.84,689.71 415.57,686.98 415.57,672.13 R14.1 438.98,648.72 438.98,646.36 ; 896.74,382.6 897.3,383.16 897.3,419.52 IC4.3 ; C10.1 976,553 ; D9.2 1044.3,350.46 1048.17,346.59 U1.3 ; C7.1@1149,45.54 C7.1
  Bottom w10: C6.1 C8.1 C7.1@1149,45.54
  Bottom w16: v5(259.84,444.88) 288.98,444.88 ; C3.1@299,50.56 C3.1 C3.1@299,58.44 ; R2.2 626.53,118.83 626.53,127.53 636,137 636,147.25 639.09,150.33 639.09,166.47 IC2.2 ; R15.1@710.43,712.8 706.69,716.54 Q3.2 706.69,785.43 v3(732.28,811.02) ; Z3.2 785.66,351.61 792.42,344.84 792.42,335.99 811.15,317.26 811.15,290.02 814,287.16 v3(814,285)
  other v1: 717,135 820,136 913,137 404,188 527,260 1099.53,321.64 1179.16,360.1 469,542 1105.01,615.3 999,693 253,708 329,830 1098.29,847.43 1280,873
  other v2: 967,22 1370.08,212.6 924,256 267.72,279.53 1374.02,409.45 696.85,909.45
  other v3: 1110.35,546.82
  other v4: 539.55,114.17
P0: JP1.2 R12.1 | length 70.2
  Bottom w16: JP1.2 271.91,591.5 276.41,596 R12.1
P0_COM: J2.3 K1.3 | length 292.7
  Top w24: K1.3 554.23,598.92 J2.3@554.23,399.61
P0_CONTROL: D10.1 Q2.1 R12.2 R14.2 | length 126.5
  Bottom w10: Q2.1 376.7,639.58 R12.2 D10.1 R14.2@423.3,628
  Bottom w16: R14.2@422.3,629 R14.2@423.3,628 ; D10.1@424.28,594.04 424.77,594.52 D10.1@426.25,596
P0_INT: J1.1 JP1.1 | length 302.1
  Bottom w10: J1.1 112,713.98 112,634 128.01,617.99 174.01,617.99 180,612 218.46,612 220.55,609.91 232.41,609.91 239.91,602.41 JP1.1
P0_N: J2.4 JP8.2 | length 491
  Top w24: v4(488.19,755.91) 488.19,751.97 605.58,634.58 605.58,511.42 636.2,480.8 636.2,427.01 J2.4
  Bottom w24: v4(488.19,755.91) JP8.2
P0_NC: JP8.1 K1.7 | length 76.7
  Bottom w24: K1.7 442.11,864.97 456.19,850.89 JP8.1
P0_NO: JP8.3 K1.5 | length 76.7
  Bottom w24: JP8.3 520.19,850.9 534.26,864.97 K1.5
P0_RELAY: K1.8 Q2.3 Z4.2 | length 234.9
  Bottom w20: K1.8 249.07,838.45 Z4.2 251.28,783 256.05,778.24 256.05,749.95 279.69,726.31 Q2.3
P1_INT: J1.2 JP2.1 | length 425.6
  Top w10: J1.2 114.17,714.17 114.17,885.83 220.47,992.13 JP2.1
P2_INT: J1.3 JP3.1 | length 644
  Bottom w10: J1.3 110.24,515.75 200.79,515.75 228.35,543.31 287.4,543.31 315.11,571.02 641.85,571.02 649.35,578.52 JP3.1
P6_ADC: JP4.2 R5.2 | length 1827.9
  Top w10: v2(313,276) 313,56 317.82,51.18 929.13,51.18 1075.97,198.03 1075.97,272 1089.97,286 1119,286 1154,321 1154,383 1184.58,413.58 1184.58,744.42 v1(1152,777)
  Bottom w10: JP4.2 275.84,314.71 313,277.55 v2(313,276) ; R5.2 1111.48,758.53 1129.95,777 v1(1152,777)
P6_ADC_INT: J1.7 JP4.1 | length 295.2
  Bottom w10: J1.7 112.6,212.6 188.98,212.6 243.84,267.46 JP4.1
P10_FSYNC: D8.1 IC4.4 JP5.2 R7.2 U1.2 | length 722.1
  Top w10: v1(883.87,613.85) 883.87,614.42 894.97,625.53 1000.14,625.53 v1(1015.21,640.6) ; v1(992,532) 998,526 v1(998,323)
  Bottom w10: D8.1 845.5,541.2 847.37,541.2 905.3,599.13 903.04,599.13 899.47,602.7 899.47,603 890.53,611.94 885.78,611.94 v1(883.87,613.85) ; D8.1@840.07,535.63 840.37,535.63 846.41,529.59 846.41,529.28 877.32,498.37 IC4.4 ; v1(992,532) 1018.86,558.86 1018.86,593.86 1020,595 1020,633.11 1015.21,637.89 v1(1015.21,640.6) ; v1(998,323) 1000,321 U1.2
P10_FSYNC_INT: J5.3 JP5.1 | length 314.6
  Bottom w10: JP5.1 1151,593 1171,613 1288.57,613 J5.3
P12: JP2.2 JP3.2 R13.1 | length 854.6
  Top w10: JP2.2 342.26,933.58 603.23,933.58 643.43,893.38 643.43,787.43 v2(630,774)
  Bottom w10: v2(630,774) 601,745 601,650 621.08,629.92 673.23,629.92 681.35,621.8 JP3.2@681.35,602.36
  Bottom w16: JP3.2@681.35,601.87 JP3.2 681.35,587.8 685.85,583.3 R13.1
P12_COM: J2.5 K2.3 | length 651.5
  Top w24: J2.5@749,434 749,686.01 866.14,803.15 929.13,803.15 952.76,779.53 952.76,720.08 K2.3
P12_CONTROL: D11.1 Q3.1 R13.2 R15.2 | length 151.9
  Bottom w16: R13.2 747.59,620.7 750.42,623.53 750.42,627.41 757.87,634.86 757.87,670 757.87,681 757.87,721 Q3.1
P12_N: J2.6 JP9.2 | length 505.6
  Top w24: J2.6 834.65,425.41 834.65,512.35 789,558 789,669 873.61,753.61 895.34,753.61 v4(897.64,755.91)
  Bottom w24: v4(897.64,755.91) JP9.2
P12_NC: JP9.1 K2.7 | length 84.9
  Bottom w24: K2.7 865.64,864.96 JP9.1
P12_NO: JP9.3 K2.5 | length 84.9
  Bottom w24: JP9.3 929.64,864.96 K2.5@984.25,864.96
P12_RELAY: K2.8 Q3.3 Z5.2 | length 109.5
  Bottom w16: K2.8 732.28,864.96 Q3.3
  Bottom w24: Z5.2@639.75,849.69 651.88,861.82 681.89,861.82 K2.8
SW: IC1.1 L2.2 | length 74
  Bottom w16: L2.2 286.44,245.94 IC1.1@357,245.94
SYNC: J2.8 JP7.2 | length 137.2
  Top w12: v1(1045,504) 1045.46,503.54 J2.8
  Bottom w12: v1(1045,504) 1046,503 JP7.2
SYNC_IN: JP7.3 R10.2 | length 175.5
  Bottom w5: R10.2 845.55,452.7 855.85,463 1011,463 JP7.3
SYNC_IN_INT: D7.1 IC4.2 R6.2 R10.1 Z3.1 | length 337.2
  Bottom w5: R10.1 849.16,420.46 858.46,420.46 888,450 913,450 918.61,444.39 918.61,424.02 IC4.2
  Bottom w8: Z3.1 912.24,351.61 923,362.37 IC4.2
  Bottom w10: D7.1@787,419.25 790.95,415.3 R10.1
  Bottom w16: D7.1@787,419.25 788.48,417.77 D7.1@788.96,417.28 ; Z3.1 916.38,345.89 916.38,322.21 949.47,289.12 949.47,288.42 952.24,285.65 R6.2@952.95,285.65
SYNC_OUT: JP7.1 R9.2 | length 63.2
  Bottom w16: JP7.1 1078.47,459.53 R9.2
SYNC_OUT_INT: D9.1 R9.1 U1.4 | length 129.4
  Bottom w14: D9.1 1133.5,391 R9.1 1141,347.46 1140.12,346.59 U1.4
V_BATT: C4.2 C9.2 C11.2 IC1.4 IC3.5 K1.1 K2.1 R6.1 U1.5 Z4.1 Z5.1 | length 3122.8
  Top w10: v1(1055.36,764.52) 1066.86,753.02 1076.54,753.02 1079.41,750.14 IC3.5
  Top w14: K2.1 691.4,671.33 691.4,687.4 851,847 939,847 1021.48,764.52 v1(1055.36,764.52)
  Top w16: K2.1 556.66,793.34 544.09,793.34 515.53,821.91 459.81,821.91 431.24,793.34 403.97,793.34 K1.1 275.59,662.61 295,643.2 295,342 347,290 347,130 385,92 v3(476,92) 476.11,92 489.37,78.74 910.69,78.74 v3(1037.43,205.48)
  Bottom w16: C4.2@439.4,78.74 IC1.4 ; v3(476,92) 462.74,78.74 447.18,78.74 C4.2@439.4,70.96 ; R6.1 989.7,284.41 992.53,281.58 993.12,281.58 1011.7,263 1022,263 1037.43,247.57 v3@1037.43,206.89 ; v3(1037.43,205.48) v3@1037.43,206.89 ; C9.2 1054.4,762.47 1055.36,763.43 v1(1055.36,764.52) ; C11.2 1178.46,295.41 U1.5 1109.9,295.41 1109.78,295.29 1109.78,279.24 v3@1037.43,206.89 ; C4.2@439.4,70.96 439.4,68.94 C4.2 433.46,65.03 C4.2@439.4,70.96
  Bottom w20: K1.1 282.96,664.97 298.99,681 367,681 382.93,696.93 Z4.1
  Bottom w24: K1.1 K1.1@280.04,669.42 ; Z5.1@645.09,686.34 662.01,669.42 680.59,669.42 K2.1
VCC: C3.2 C10.2 D2.1 IC4.5 J1.8 L2.1 R7.1 Z2.2 | length 2828.1
  Top w10: J1.8 114.17,114.17 114.17,594.17 133,613 181,613 213,645 v2(213,842)
  Bottom w10: J1.8 114.17,114.17 293.71,114.17 C3.2 ; v2(213,842) 212.6,842.4 212.6,891.96 212.54,892.01 212.54,992.69 218.46,998.6 1037.46,998.6 1073.94,962.12 1073.94,843.49 1089.95,827.48 v1(1089.95,805.38) 1058.92,805.38 974.2,720.66 974.2,627.5 R7.1 939.06,592.36 939.06,579.42 919.7,560.05 919.7,559.35 C10.2@913.35,553 ; C10.2 C10.2@913.35,553 ; R7.1@942.7,599.13 R7.1@948.59,593.24 ; IC4.5 945.72,501.25 945.72,519.61 938.83,526.5 938.83,526.81 924.72,540.92 924.72,541.63 C10.2@913.35,553
  Bottom w16: L2.1 299.22,180.5 305,174.72 C3.2@305,113.59
VIN: D1.1 J5.7 | length 234.9
  Bottom w18: D1.1 1136.7,211.99 1289.58,211.99
  Bottom w24: 1289.58,211.99 J5.7
pads on no net: FD1.1 FD2.1 FD3.1 FD4.1 FD5.1 FD6.1 FD7.1 FD8.1 IC1.3 IC1.5 IC4.1 J1.4 J1.5 J1.6 J2.9 J2.10 J3.1 J3.2 J3.3 J3.4 J3.5 J3.6 J3.7 J4.1 J4.2 J4.3 J4.4 J4.5 J4.6 J4.7 J4.8 J5.1 J5.2 J5.4 J5.5 J5.6 U1.1

## Polygon pours and split planes (outlines as drawn)
GND on Top "Polygon_2_Net_GND" (solid, remove dead copper, pour order 1): -2.06,-2.06 1403.64,-2.06 1403.64,1057.18 -2.06,1057.18
GND on Bottom "Polygon_1_Net_GND" (solid, remove dead copper, pour order 0): 1.87,1.87 1399.7,1.87 1399.7,1053.24 1.87,1053.24

## Keep-outs
Keep-Out Layer:
  the board outline again, w0

## Other copper
Top:
  pour cut-out: 482,306.03 482,554 427,609 427,768.91 465.72,807.64 509.36,807.64 570,747 766,747 852.75,833.75 933.51,833.75 990,777.25 990,700 988,700 913,625 913,303.97
Bottom:
  pour cut-out: 799,926 766,893 766,823 837,752 837,646 858,625 935,625 958,648 958,722 1044,808 1044,889 1007,926
  pour cut-out: 425,733 425,797 409,813 369,813 345,837 345,896 367,918 610,918 634,894 634,834.78 554,750 554,654 527.11,624.51 473.16,624.6 449,638 447,699

## Silkscreen, mask and mechanical layers (free items; w line width, h text height)
Top Overlay:
  drawing of 262 lines, arcs and shapes, not listed
  text "PWR - 6V to 36V" at 535.43,992.13 h27.2
  text "Relay" at 1180,982 h27.2
  text "P1" at 354.33,968.5 h27.2 r90
  text "AIN - 0 to 5V or 4-20mA" at 535.43,944.88 h27.2
  text "R2" at 1345,927 h27.2
  text "Shield" at 1176,926 h27.2
  text "SYN - 0 to 5V I/O" at 535.43,897.64 h27.2
  text "OpenMV" at 51,884 h26.35
  text "mA" at 874.82,580.29 h27.2 r90
  text "P0" at 515.99,540.06 h27.2
  text "P0" at 630.17,540.06 h27.2
  text "P12" at 708.91,540.06 h27.2
  text "P12" at 815.2,540.06 h27.2
  text "PWR" at 321.08,495.06 h27.2
  text "GND" at 419.5,495.06 h27.2
  text "COM" at 513.99,495.06 h27.2
  text "OC" at 628.17,495.06 h27.2
  text "COM" at 706.91,495.06 h27.2
  text "OC" at 813.2,495.06 h27.2
  text "AIN" at 907.69,495.06 h27.2
  text "SYN" at 1006.12,495.06 h27.2
Bottom Overlay:
  drawing of 1318 lines, arcs and shapes, not listed
  text "Relay Shield R2" at 693,997 h27.2
  text "https://openmv.io" at 693,950 h27.2
  text "8.7.23" at 614.17,897.64 h27.2
  text "OpenMV" at 1369.14,851.96 h26.35
  text "NC" at 843.82,737.02 h27.2 r270
  text "NO" at 925.37,736.32 h27.2 r270
  text "NC" at 434.76,732.83 h27.2 r270
  text "NO" at 519.35,732.33 h27.2 r270
  text "P0" at 503.94,692.91 h27.2
  text "P12" at 931.57,693.26 h27.2
  text "FSYNC" at 1169,644 h27.2
  text "P10" at 1167.14,579.92 h27.2
  text "P2" at 579.11,576.73 h27.2 r270
  text "P0" at 278,511 h27.2
  text "O" at 1086.33,510.89 h27.2
  text "I" at 1017,510 h27.2
  text "P6" at 220.47,389.76 h27.2 r270
  text "ADC" at 268.47,389.76 h27.2 r270
  text "VIN" at 1320,200 h25
  text "RAW" at 211,142 h25 r270
  text "GND" at 1319,101 h25
  text "GND" at 263,14 h25